# Altium PCB PCB.PcbDoc
Units mm, origin at the board's own origin, x right, y up, seen from the top; angles counter-clockwise.
Board outline 20 x 15 mm, 2 copper layers (Top Layer, Bottom Layer); 15 components, 12 nets, 62 pads, 10 vias.
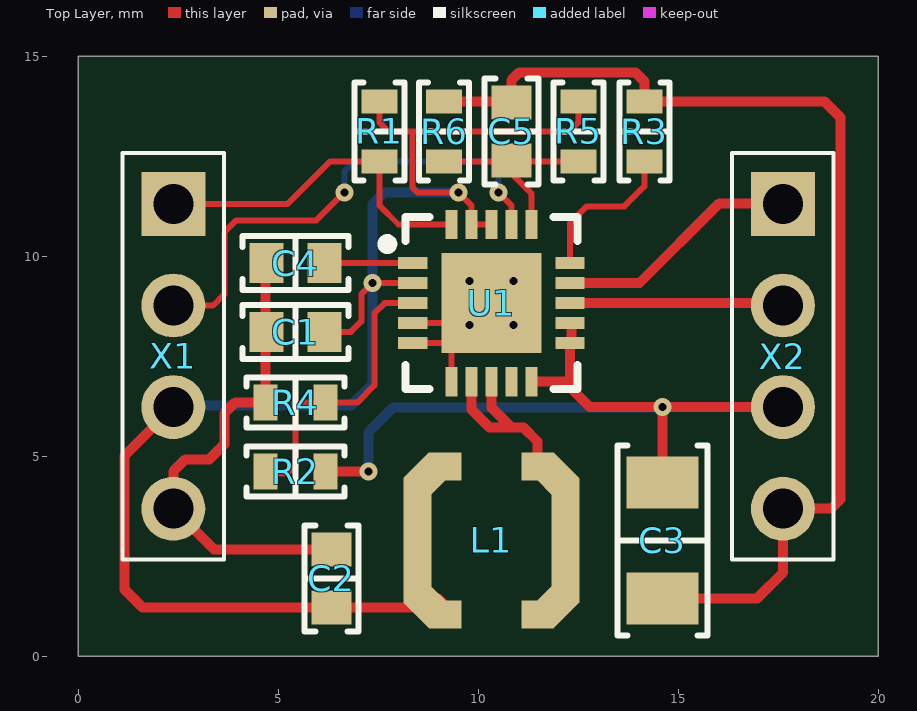
[diagram p0: Top Layer view]
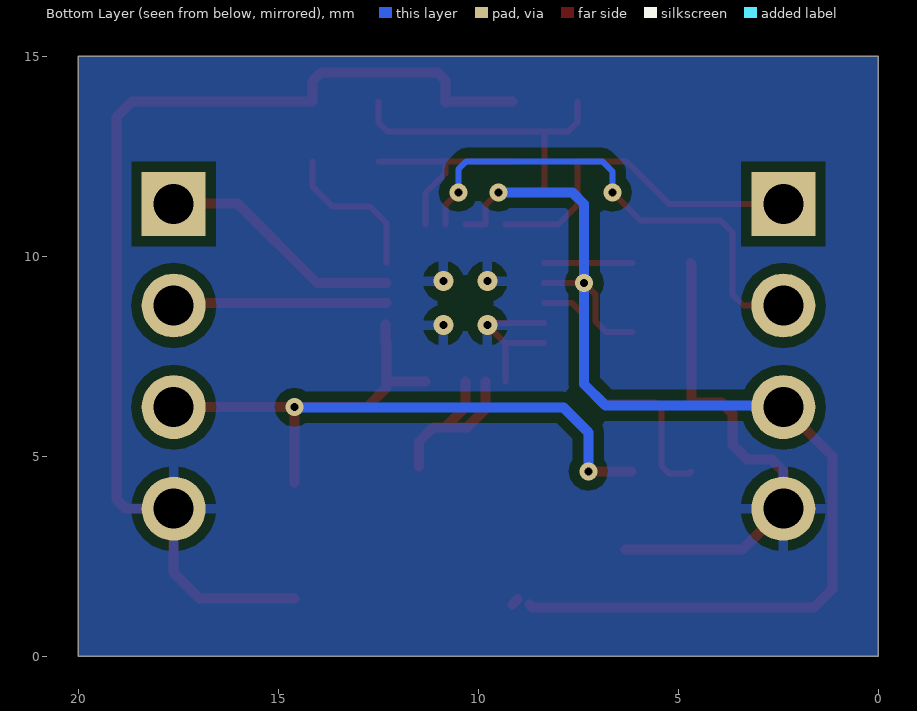
[diagram p1: Bottom Layer view, seen from below]
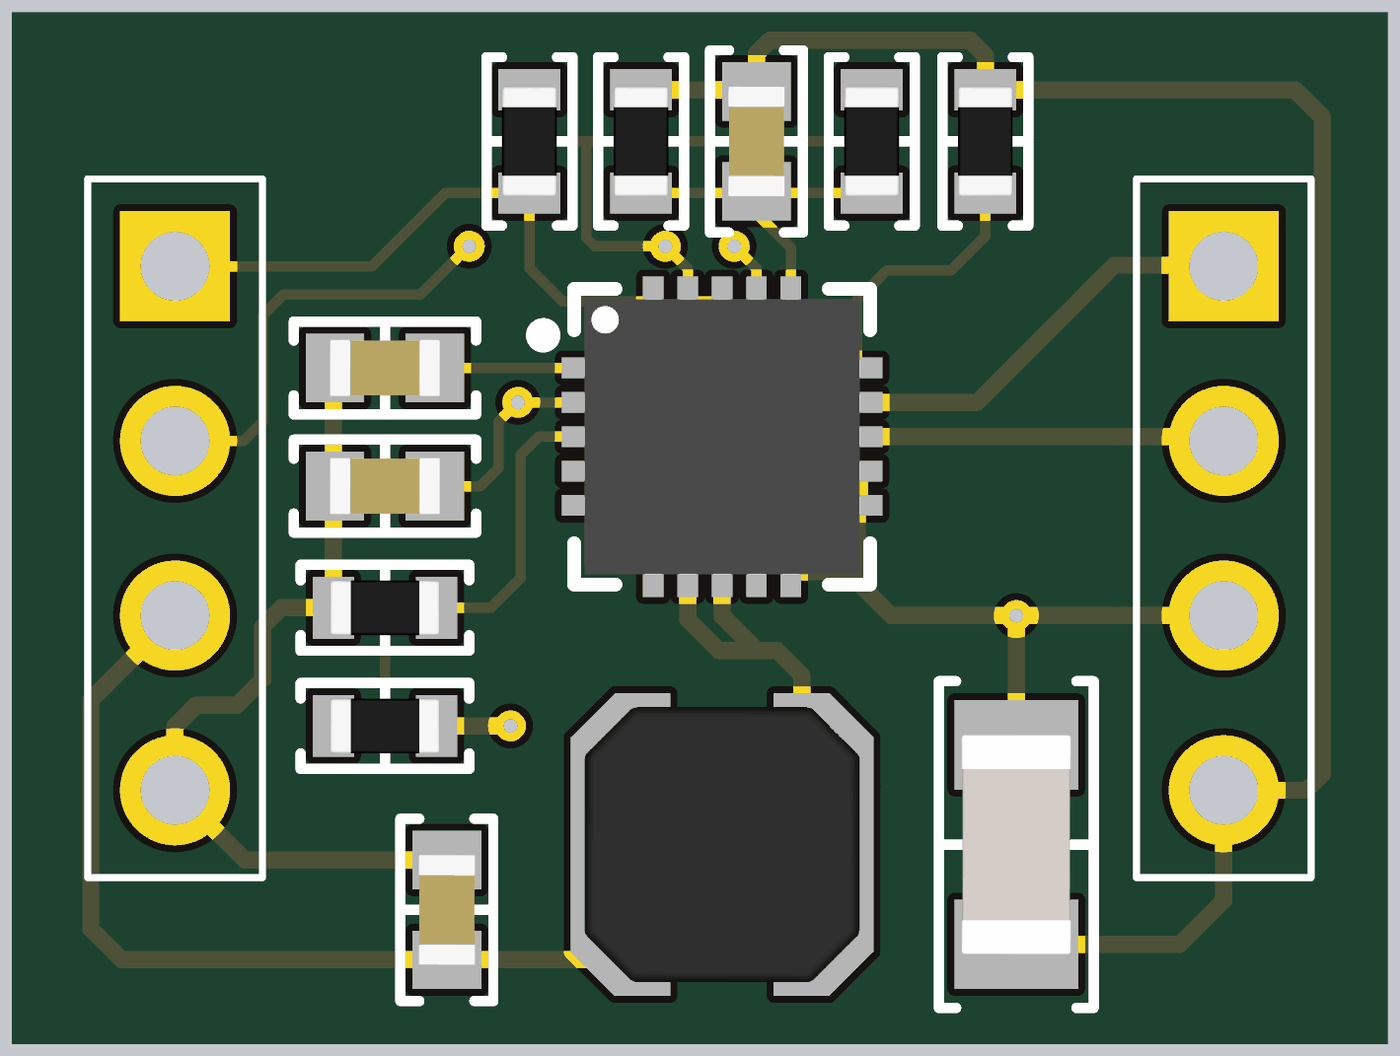
[diagram p2: 3D render of the assembled board from above, using the file's embedded part models]

## Layer stack, top to bottom
Top Solder: solder mask 0.0102, Solder Resist, Dk 3.5
Top Layer: signal copper 0.0356
Dielectric 1: dielectric 0.32, FR-4, Dk 4.8
Bottom Layer: signal copper 0.0356
Bottom Solder: solder mask 0.0102, Solder Resist, Dk 3.5

## Board outline
0,0 20,0 20,15 0,15

## Design rules (kind name [scope] priority, off if disabled: settings)
Clearance [All] p1: gap=0.254 ignorepadtopadclearanceinfootprint=FALSE except(0: Arc-Hole Track-Hole SMDPad-Hole THPad-Hole Via-Hole Fill-Hole Poly-Hole Region-Hole Text-Hole)
PolygonConnect [All] p1: connectstyle=Relief reliefconductorwidth=0.254 reliefentries=4 polygonreliefangle="90 Angle" airgapwidth=0.254
RoutingVias [All] p1: holewidth=0.711 width=1.27 viastyle="Through Hole" minholewidth=0.2 minwidth=0.45 maxholewidth=0.711 maxwidth=1.27
SolderMaskExpansion [All] p1: expansion=0.102
Width [All] p1: maxlimit=0.254 minlimit=0.15 preferedwidth=0.254
30 further rules are at their usual default settings.

## Components (designator, comment, footprint, x,y, rotation, side; value= is the part's Value field where it differs from the comment)
C1 "100nF" "CAP 0603/1608" 5.425,8.112 r0 top
C2 "100nF" "CAP 0603/1608" 6.325,1.95 r270 top
C3 "100nF" "CAP 1206/3216" 14.6,2.9 r90 top
C4 "100nF" "CAP 0603/1608" 5.425,9.831 r180 top
C5 "100nF" "CAP 0603/1608" 10.825,13.125 r90 top
L1 "4.7uH" COILCRAFT_LPS4018 10.325,2.9 r0 top
R1 "100K" "RES 0603/1608" 7.525,13.125 r90 top
R2 "768K" "RES 0603/1608" 5.425,4.625 r0 top
R3 "7K5" "RES 0603/1608" 14.15,13.125 r270 top
R4 "9K76" "RES 0603/1608" 5.425,6.344 r0 top
R5 "2K2" "RES 0603/1608" 12.5,13.125 r270 top
R6 "2K2" "RES 0603/1608" 9.147,13.125 r270 top
U1 "DRV8662RGPT" "QFN-20 4x4MM" 10.325,8.831 r0 top
X1 "TH_Pad" "1X4 TH_PAD" 2.375,11.31 r270 top
X2 "TH_Pad" "1X4 TH_PAD" 17.615,11.31 r270 top

## Footprints (in the part's own frame and the unit in brackets; to place one, negate y for a bottom-side part, rotate by r counter-clockwise, add the part's x,y. Pads: shape width x height; smd on the part's side, far side on the other; paste and mask are expansions set on the pad)
"1X4 TH_PAD" [mm] "1X4 2.54MM TH PAD"
  rect 1.6x1.6 hole 1: 1(0,0)
  round 1.6 hole 1: 2(2.54,0) 3(5.08,0) 4(7.62,0)
  silkscreen extent -1.27,-1.27 8.89,1.27
"CAP 0603/1608" [mm] "Chip Capacitor, 2-Leads, Body 1.60x0.80mm, IPC Medium Density"
  rect 0.85x1 smd: 1(-0.725,0) 2(0.725,0)
  silkscreen extent -1.33,-0.67 1.33,0.67, body extent -0.8,-0.41 0.8,0.41, height 0.82
"CAP 1206/3216" [mm] "Chip Capacitor, 2-Leads, Body 3.25x1.60mm, IPC Medium Density"
  rect 1.3x1.8 smd: 1(-1.45,0) 2(1.45,0)
  silkscreen extent -2.37,-1.12 2.37,1.12, body extent -1.6,-0.8 1.6,0.8, height 0.8
COILCRAFT_LPS4018 [mm] "Shielded Power Inductor, Body 4.0x4.0x1.8mm"
  round 0.5 on Mech15: 0(0,0)
  rrect1% 0.7x3.124 smd: 1(-1.85,0) 2(1.85,0)
  rrect1% 0.786x0.902 smd rot 45: 1(-1.603,-1.603) 2(1.603,1.603)
  rrect1% 0.786x0.902 smd rot 135: 1(-1.603,1.603) 2(1.603,-1.603)
  rrect1% 0.812x0.7 smd: 1(-1.156,-1.85) 1(-1.156,1.85) 2(1.156,-1.85) 2(1.156,1.85)
  Top Layer pour cut-out: -1.524,2.286 1.524,2.286 1.524,-2.286 -1.524,-2.286
  body extent -2,-2 2,2, height 1.79
"QFN-20 4x4MM" [mm] "QFN, 20-Leads, Body 4.00x4.00mm, Pitch 0.50mm, Thermal Pad 2.50x2.50mm, IPC Medium Density"
  rect 0.73x0.3 smd: 1(-1.965,1) 2(-1.965,0.5) 3(-1.965,0) 4(-1.965,-0.5) 5(-1.965,-1) 11(1.965,-1) 12(1.965,-0.5) 13(1.965,0) 14(1.965,0.5) 15(1.965,1)
  rect 0.3x0.73 smd: 6(-1,-1.965) 7(-0.5,-1.965) 8(0,-1.965) 9(0.5,-1.965) 10(1,-1.965) 16(1,1.965) 17(0.5,1.965) 18(0,1.965) 19(-0.5,1.965) 20(-1,1.965)
  rect 2.5x2.5 smd: 21(0,0)
  silkscreen extent -2.72,-2.15 2.15,2.15, body extent -2,-2 2.01,2.01, height 0.9
"RES 0603/1608" [mm] "Chip Resistor, 2-Leads, Body 1,60x0,80mm, IPC Medium Density"
  rect 0.6x0.9 smd: 1(-0.75,0) 2(0.75,0)
  silkscreen extent -1.22,-0.63 1.22,0.63, body extent -0.8,-0.4 0.8,0.4, height 0.5

## Part data
C1 C2 C4 C5: library part CGA3E2X7R1E104K080AA, "CAPACITOR 0603 100nF 25V 10%", Case/Package=0603, Case Code (Metric)=1608, Dielectric=X7R, Manufacturer=TDK, Max Operating Temperature=125°C, Min Operating Temperature=-55°C, Package Quantity=1, Ratings=AEC-Q200, Resistor Type=Ceramic, Tolerance=10%, Voltage Rating=25V, Capacitance=100nF, Case Code (Imperial)=0603, ComponentLink1Description=http://www.farnell.com/datasheets/1735392.pdf?src-supplier=Element14, ComponentLink1URL=http://www.farnell.com/datasheets/1735392.pdf?src-supplier=Element14, ComponentLink2Description=https://product.tdk.com/info/en/documents/chara_sheet/CGA3E2X7R1E104K080AA.pdf?src-supplier=Mouser, ComponentLink2URL=https://product.tdk.com/info/en/documents/chara_sheet/CGA3E2X7R1E104K080AA.pdf?src-supplier=Mouser, ComponentLink3Description=http://product.tdk.com/capacitor/mlcc/en/documents/mlccspec_automotive_general_midvoltage_en.pdf?src-supplier=Future+Electronics, ComponentLink3URL=http://product.tdk.com/capacitor/mlcc/en/documents/mlccspec_automotive_general_midvoltage_en.pdf?src-supplier=Future+Electronics, ComponentLink4Description=http://www.farnell.com/datasheets/1735392.pdf?src-supplier=Newark, ComponentLink4URL=http://www.farnell.com/datasheets/1735392.pdf?src-supplier=Newark, Depth=0.8mm, Height=0.8mm, Lead Free="Lead Free", Length=1.6mm, Manufacturer Part Number=CGA3E2X7R1E104K080AA, Mount="Surface Mount", Packaging="Tape and Reel", REACH SVHC="No SVHC", Stock 1=0, Supplier 1=Farnell, Termination=SMD/SMT, Thickness=0.035inch, Voltage Rating (DC)=25V, Weight=7.1E-05oz, Width=0.031inch
C3: library part GRM31CR72E104KW03L, "CAPACITOR 1206 100nF 250V X7R 10%", Case/Package=1206, Case Code (Metric)=3216, Dielectric=X7R, Insulation Resistance=10GR, Manufacturer=Murata, Max Operating Temperature=125°C, Min Operating Temperature=-55°C, Package Quantity=1, Tolerance=10%, Voltage=250V, Capacitance=100nF, Case Code (Imperial)=1206, ComponentLink1Description=http://search.murata.co.jp/Ceramy/image/img/A01X/G101/ENG/GRM31CR72E104KW03-01.pdf?src-supplier=Digi-Key, ComponentLink1URL=http://search.murata.co.jp/Ceramy/image/img/A01X/G101/ENG/GRM31CR72E104KW03-01.pdf?src-supplier=Digi-Key, ComponentLink2Description=http://www.farnell.com/datasheets/2048642.pdf?src-supplier=Element14, ComponentLink2URL=http://www.farnell.com/datasheets/2048642.pdf?src-supplier=Element14, ComponentLink3Description=http://www.jameco.com/Jameco/Products/ProdDS/1859520.pdf?src-supplier=Jameco, ComponentLink3URL=http://www.jameco.com/Jameco/Products/ProdDS/1859520.pdf?src-supplier=Jameco, ComponentLink4Description=http://psearch.en.murata.com/capacitor/product/GRM31CR72E104KW03%23.pdf?src-supplier=Future+Electronics, ComponentLink4URL=http://psearch.en.murata.com/capacitor/product/GRM31CR72E104KW03%23.pdf?src-supplier=Future+Electronics, ComponentLink5Description=http://uk.rs-online.com/webdocs/1423/0900766b81423c94.pdf?src-supplier=RSComponents, ComponentLink5URL=http://uk.rs-online.com/webdocs/1423/0900766b81423c94.pdf?src-supplier=RSComponents, ComponentLink6Description=http://components.arrow.com/part/dataview/41887619S9850855N2606?src-supplier=Arrow+Electronics, ComponentLink6URL=http://components.arrow.com/part/dataview/41887619S9850855N2606?src-supplier=Arrow+Electronics, Depth=1.6mm, Dissipation Factor=0.025%, Height=1.6mm, Lead Free="Lead Free", Length=3.2mm, Manufacturer Part Number=GRM31CR72E104KW03L, Material=Ceramic, Mount="Surface Mount", Number of Pins=2, Packaging="Tape and Reel", Pricing 1="150=0.332, 250=0.321, 500=0.257, 1000=0.193, 2000=0.154, 10000=0.129 (EUR)", Radiation Hardening=No, REACH SVHC="No SVHC", Stock 1=0, Supplier 1=Farnell, Termination=SMD/SMT, Thickness=0.071inch, Voltage Rating=250V, Voltage Rating (DC)=250V, Weight=0.000571oz, Width=1.6mm
L1: library part LPS4018-472MRB, "INDUCTOR 4.7µH 1.3A", DC Resistance (DCR)=125mR, Inductance Tolerance=20%, Manufacturer=Coilcraft, Max DC Current=1.9A, Max Operating Temperature=85°C, Min Operating Temperature=-40°C, Package Quantity=1, RMS Current (Irms)=1.3A, Self Resonant Frequency=65MHz, Test Frequency=100kHz, ComponentLink1Description=http://www.farnell.com/datasheets/1805324.pdf?src-supplier=Element14, ComponentLink1URL=http://www.farnell.com/datasheets/1805324.pdf?src-supplier=Element14, Core Material=Ferrite, Height=1.7mm, Inductance=4.7uH, Length=4mm, Manufacturer Part Number=LPS4018-472MRB, Packaging="Cut Tape", Pricing 1="10=1.57, 50=0.828, 100=0.742, 250=0.656, 500=0.57, 1000=0.472, 5000=0.463 (EUR)", REACH SVHC="No SVHC", Saturation Current=1.9A, Shielding=Shielded, Stock 1=0, Supplier 1=Farnell, Termination=SMD/SMT, Tolerance=20%, Weight=0.003527oz, Width=4mm
R1: library part ERJ3EKF1003V, "RESISTOR 0603 100K 1%", Case/Package=0603, Case Code (Metric)=1608, Manufacturer=Panasonic, Max Operating Temperature=155°C, Max Power Dissipation=100mW, Min Operating Temperature=-55°C, Package Quantity=5000, Resistor Type="Thick Film", Temperature Coefficient=100ppm/°C, Tolerance=1%, Voltage Rating=75V, Case Code (Imperial)=0603, ComponentLink1Description=http://industrial.panasonic.com/www-data/pdf/AOA0000/AOA0000CE2.pdf?src-supplier=Future+Electronics, ComponentLink1URL=http://industrial.panasonic.com/www-data/pdf/AOA0000/AOA0000CE2.pdf?src-supplier=Future+Electronics, ComponentLink2Description=https://www.verical.com/server-webapp/html/getDatasheet?partID=247527&src-supplier=Verical, ComponentLink2URL=https://www.verical.com/server-webapp/html/getDatasheet?partID=247527&src-supplier=Verical, ComponentLink3Description=http://www.alliedelec.com/m/d/623f45ff1957d936ff56d46fd1c28cac.pdf?src-supplier=Allied+Electronics, ComponentLink3URL=http://www.alliedelec.com/m/d/623f45ff1957d936ff56d46fd1c28cac.pdf?src-supplier=Allied+Electronics, ComponentLink4Description=http://www.jameco.com/Jameco/Products/ProdDS/1987476.pdf?src-supplier=Jameco, ComponentLink4URL=http://www.jameco.com/Jameco/Products/ProdDS/1987476.pdf?src-supplier=Jameco, Contact Plating=Tin, Depth=0.8mm, Features="Automotive AEC-Q200", Height=0.022inch, Lead Free="Lead Free", Length=1.6mm, Manufacturer Part Number=ERJ3EKF1003V, Military Standard=Not, Mount="Surface Mount", Number of Pins=2, Number of Terminations=2, Packaging="Tape and Reel", Power Rating=100mW, Radiation Hardening=No, REACH SVHC="No SVHC", Resistance=100K, Stock 1=0, Supplier 1=Farnell, Termination=SMD/SMT, Voltage Rating (DC)=75V, Weight=7.1E-05oz, Width=0.8mm
R2: library part ERJ3EKF7683V, "RESISTOR 0603 768K 1%", Case/Package=0603, Case Code (Metric)=1608, Manufacturer=Panasonic, Manufacturer Part Number=ERJ-3EKF7683V, Max Operating Temperature=155°C, Max Power Dissipation=100mW, Min Operating Temperature=-55°C, Package Quantity=1, Resistor Type="Thick Film", Temperature Coefficient=100ppm/°C, Tolerance=1%, Voltage Rating=75V, Voltage Rating (DC)=50V, Case Code (Imperial)=0603, ComponentLink1Description=http://www.farnell.com/datasheets/1678782.pdf?src-supplier=Element14, ComponentLink1URL=http://www.farnell.com/datasheets/1678782.pdf?src-supplier=Element14, ComponentLink2Description=http://industrial.panasonic.com/www-data/pdf/AOA0000/AOA0000CE2.pdf?src-supplier=Avnet, ComponentLink2URL=http://industrial.panasonic.com/www-data/pdf/AOA0000/AOA0000CE2.pdf?src-supplier=Avnet, Contact Plating=Tin, Depth=0.8mm, Features="Automotive AEC-Q200", Height=0.022inch, Lead Free="Lead Free", Length=1.6mm, Military Standard=Not, Mount="Surface Mount", Number of Terminations=2, Packaging="Tape and Reel", Power Rating=100mW, REACH SVHC=Yes, Resistance=768K, Stock 1=0, Supplier 1=Farnell, Termination=SMD/SMT, Width=0.8mm
R3: library part ERJ3EKF7501V, "RESISTOR 0603 7.5K 1%", Case/Package=0603, Case Code (Metric)=1608, Manufacturer=Panasonic, Manufacturer Part Number=ERJ-3EKF7501V, Max Operating Temperature=155°C, Max Power Dissipation=100mW, Min Operating Temperature=-55°C, Package Quantity=1, Resistor Type="Thick Film", Temperature Coefficient=100ppm/°C, Tolerance=1%, Voltage Rating=75V, Voltage Rating (DC)=50V, Case Code (Imperial)=0603, ComponentLink1Description=http://www.farnell.com/datasheets/1911175.pdf?src-supplier=Farnell, ComponentLink1URL=http://www.farnell.com/datasheets/1911175.pdf?src-supplier=Farnell, ComponentLink2Description=http://www.farnell.com/datasheets/1678782.pdf?src-supplier=Element14, ComponentLink2URL=http://www.farnell.com/datasheets/1678782.pdf?src-supplier=Element14, ComponentLink3Description=http://industrial.panasonic.com/www-data/pdf/AOA0000/AOA0000CE2.pdf?src-supplier=Avnet, ComponentLink3URL=http://industrial.panasonic.com/www-data/pdf/AOA0000/AOA0000CE2.pdf?src-supplier=Avnet, ComponentLink4Description=http://www.farnell.com/datasheets/1911175.pdf?src-supplier=Element14, ComponentLink4URL=http://www.farnell.com/datasheets/1911175.pdf?src-supplier=Element14, ComponentLink5Description=http://www.farnell.com/datasheets/426256.pdf?src-supplier=Element14, ComponentLink5URL=http://www.farnell.com/datasheets/426256.pdf?src-supplier=Element14, ComponentLink6Description=https://www.alliedelec.com/m/d/623f45ff1957d936ff56d46fd1c28cac.pdf?src-supplier=Allied+Electronics, ComponentLink6URL=https://www.alliedelec.com/m/d/623f45ff1957d936ff56d46fd1c28cac.pdf?src-supplier=Allied+Electronics, Contact Plating=Tin, Depth=0.8mm, Features="Automotive AEC-Q200", Height=0.022inch, Lead Free="Lead Free", Length=1.6mm, Military Standard=Not, Mount="Surface Mount", Number of Terminations=2, Packaging="Tape and Reel", Power Rating=100mW, Pricing 1="150=0.0229, 500=0.0168, 1000=0.0106, 2500=0.0082, 5000=0.0065, 25000=0.006 (EUR)", Radiation Hardening=No, REACH SVHC="No SVHC", Resistance=7K5, Stock 1=0, Supplier 1=Farnell, Termination=SMD/SMT, Width=0.8mm
R4: library part ERJ3EKF9761V, "RESISTOR 0603 9.76K 1%", Case/Package=0603, Case Code (Metric)=1608, Manufacturer=Panasonic, Manufacturer Part Number=ERJ-3EKF9761V, Max Operating Temperature=155°C, Max Power Dissipation=100mW, Min Operating Temperature=-55°C, Package Quantity=1, Resistor Type="Thick Film", Temperature Coefficient=100ppm/°C, Tolerance=1%, Voltage Rating=75V, Voltage Rating (DC)=50V, Case Code (Imperial)=0603, ComponentLink1Description=http://industrial.panasonic.com/www-data/pdf/AOA0000/AOA0000CE2.pdf?src-supplier=Avnet+Europe, ComponentLink1URL=http://industrial.panasonic.com/www-data/pdf/AOA0000/AOA0000CE2.pdf?src-supplier=Avnet+Europe, ComponentLink2Description=http://www.farnell.com/datasheets/1694929.pdf?src-supplier=Element14, ComponentLink2URL=http://www.farnell.com/datasheets/1694929.pdf?src-supplier=Element14, ComponentLink3Description=http://industrial.panasonic.com/www-data/pdf/AOA0000/AOA0000CE2.pdf?src-supplier=Avnet, ComponentLink3URL=http://industrial.panasonic.com/www-data/pdf/AOA0000/AOA0000CE2.pdf?src-supplier=Avnet, ComponentLink4Description=http://www.farnell.com/datasheets/1678782.pdf?src-supplier=Element14, ComponentLink4URL=http://www.farnell.com/datasheets/1678782.pdf?src-supplier=Element14, ComponentLink5Description=https://www.alliedelec.com/m/d/623f45ff1957d936ff56d46fd1c28cac.pdf?src-supplier=Allied+Electronics, ComponentLink5URL=https://www.alliedelec.com/m/d/623f45ff1957d936ff56d46fd1c28cac.pdf?src-supplier=Allied+Electronics, ComponentLink6Description=http://www.mouser.com/ds/2/315/AOA0000CE2-37512.pdf?src-supplier=Mouser, ComponentLink6URL=http://www.mouser.com/ds/2/315/AOA0000CE2-37512.pdf?src-supplier=Mouser, Contact Plating=Tin, Depth=0.8mm, Features="Automotive AEC-Q200", Height=0.022inch, Lead Free="Lead Free", Length=1.6mm, Military Standard=Not, Mount="Surface Mount", Number of Terminations=2, Packaging="Tape and Reel", Power Rating=100mW, Radiation Hardening=No, REACH SVHC="No SVHC", Resistance=9K76, Stock 1=0, Supplier 1=Farnell, Termination=SMD/SMT, Width=0.031inch
R5 R6: library part ERJ3EKF2201V, "RESISTOR 0603 2.2K 1%", Case/Package=0603, Case Code (Metric)=1608, Manufacturer=Panasonic, Manufacturer Part Number=ERJ-3EKF2201V, Max Operating Temperature=155°C, Max Power Dissipation=100mW, Min Operating Temperature=-55°C, Package Quantity=5000, Resistor Type="Thick Film", Temperature Coefficient=100ppm/°C, Tolerance=1%, Voltage Rating=75V, Case Code (Imperial)=0603, ComponentLink1Description=http://industrial.panasonic.com/www-data/pdf/AOA0000/AOA0000CE2.pdf?src-supplier=Avnet, ComponentLink1URL=http://industrial.panasonic.com/www-data/pdf/AOA0000/AOA0000CE2.pdf?src-supplier=Avnet, ComponentLink2Description=http://www.farnell.com/datasheets/1678782.pdf?src-supplier=Element14, ComponentLink2URL=http://www.farnell.com/datasheets/1678782.pdf?src-supplier=Element14, ComponentLink3Description=http://www.mouser.com/ds/2/315/AOA0000C283-1093288.pdf?src-supplier=Mouser, ComponentLink3URL=http://www.mouser.com/ds/2/315/AOA0000C283-1093288.pdf?src-supplier=Mouser, ComponentLink4Description=https://www.alliedelec.com/m/d/623f45ff1957d936ff56d46fd1c28cac.pdf?src-supplier=Allied+Electronics, ComponentLink4URL=https://www.alliedelec.com/m/d/623f45ff1957d936ff56d46fd1c28cac.pdf?src-supplier=Allied+Electronics, ComponentLink5Description=http://industrial.panasonic.com/www-data/pdf/AOA0000/AOA0000CE2.pdf?src-supplier=Element14, ComponentLink5URL=http://industrial.panasonic.com/www-data/pdf/AOA0000/AOA0000CE2.pdf?src-supplier=Element14, ComponentLink6Description=http://industrial.panasonic.com/www-data/pdf/AOA0000/AOA0000CE2.pdf?src-supplier=Avnet+Europe, ComponentLink6URL=http://industrial.panasonic.com/www-data/pdf/AOA0000/AOA0000CE2.pdf?src-supplier=Avnet+Europe, ComponentLink7Description=http://www.farnell.com/datasheets/1911175.pdf?src-supplier=Element14, ComponentLink7URL=http://www.farnell.com/datasheets/1911175.pdf?src-supplier=Element14, Contact Plating=Tin, Depth=0.8mm, Height=0.022inch, Lead Free="Lead Free", Length=1.6mm, Military Standard=Not, Mount="Surface Mount", Number of Pins=2, Number of Terminations=2, Packaging="Tape and Reel", Power Rating=100mW, Radiation Hardening=No, REACH SVHC="No SVHC", Resistance=2K2, Stock 1=0, Supplier 1=Farnell, Termination=SMD/SMT, Voltage Rating (DC)=75V, Width=0.8mm
U1: "PIEZO HAPTIC DRIVER", Case/Package=QFN, Collector Emitter Voltage (VCEO)=5V, Manufacturer="Texas Instruments", Max Input Voltage=750mV, Max Operating Temperature=70°C, Max Supply Voltage=5.5V, Min Input Voltage=1.4V, Min Operating Temperature=-40°C, Min Supply Voltage=3V, Nominal Supply Current=5mA, Output Current=75mA, Output Voltage=100V, Package Quantity=250, ComponentLink1Description=http://www.ti.com/general/docs/lit/getliterature.tsp?genericPartNumber=DRV8662&amp;&amp;fileType=pdf&src-supplier=Newark, ComponentLink1URL=http://www.ti.com/general/docs/lit/getliterature.tsp?genericPartNumber=DRV8662&amp;&amp;fileType=pdf&src-supplier=Newark, ComponentLink2Description=http://www.ti.com/lit/ds/symlink/drv8662.pdf?src-supplier=Digi-Key, ComponentLink2URL=http://www.ti.com/lit/ds/symlink/drv8662.pdf?src-supplier=Digi-Key, ComponentLink3Description=https://www.verical.com/server-webapp/html/getDatasheet?partID=522234&src-supplier=Verical, ComponentLink3URL=https://www.verical.com/server-webapp/html/getDatasheet?partID=522234&src-supplier=Verical, ComponentLink4Description=http://www.ti.com/lit/ds/symlink/drv8662.pdf?src-supplier=Avnet+Europe, ComponentLink4URL=http://www.ti.com/lit/ds/symlink/drv8662.pdf?src-supplier=Avnet+Europe, ComponentLink5Description=http://www.ti.com/general/docs/lit/getliterature.tsp?genericPartNumber=DRV8662&&fileType=pdf&src-supplier=Avnet, ComponentLink5URL=http://www.ti.com/general/docs/lit/getliterature.tsp?genericPartNumber=DRV8662&&fileType=pdf&src-supplier=Avnet, Contact Plating=Gold, Height=0.95mm, Interface=PWM,Analog, Lead Free="Lead Free", Length=4.15mm, Logic Function="AND GATE", Manufacturer Part Number=DRV8662RGPT, Number of Pins=20, Packaging="Tape and Reel", Quiescent Current=5mA, Radiation Hardening=No, REACH SVHC="No SVHC", Stock 1=0, Supplier 1=Farnell, Width=4.15mm
X1 X2: "1X4 2.54MM TH Pad"

## Via types
v1: diameter 0.45, hole 0.2, Top Layer to Bottom Layer, 6 vias
v2: diameter 0.5, hole 0.2, Top Layer to Bottom Layer, 4 vias

## Nets (pads, with @x,y where several pads share a name; then routed paths per layer and width w, separated by ;. In a path a pad name is that pad's centre, name@x,y a point inside that pad or via, vN(x,y) a via of type N, cw(c..) or ccw(c..) an arc to the next point about the centre after c; other vN are vias at no path point)
ENABLE: R1.1 U1.20 X1.1 | length 8.7
  Top Layer w0.15: X1.1 5.235,11.31 6.3,12.375 R1.1 7.525,11.275 8.004,10.796 U1.20
GND: C1.1 C2.1 C3.1 C4.2 C5.2 R3.1 R4.1 R6.1 U1.4 U1.5 U1.6 U1.21 X1.4 X2.4 | length 43.6
  Top Layer w0.15: U1.5 U1.21@9.325,7.831 ; U1.4 9.825,8.331 v2(9.775,8.281) U1.21@9.325,7.831 ; U1.6 U1.21@9.325,7.831
  Top Layer w0.25: C4.2 4.675,9.806 R4.1 3.931,6.344 3.925,6.35 3.65,6.075 3.65,5.3 3.275,4.925 2.675,4.925 2.375,4.625 X1.4 3.39,2.675 C2.1 ; R6.1 10.8,13.875 C5.2 10.825,14.4 11.025,14.6 13.925,14.6 14.15,14.375 R3.1 18.65,13.875 19.05,13.475 19.05,3.925 18.815,3.69 X2.4 17.615,2.09 16.975,1.45 C3.1
  other v2: 10.875,8.281 9.775,9.381 10.875,9.381
NetC4_1: C4.1 U1.1 | length 2.2
  Top Layer w0.15: C4.1 U1.1
NetC5_1: C5.1 R5.2 R6.2 U1.16 | length 5.2
  Top Layer w0.15: R6.2 C5.1@10.825,12.375 ; C5.1 C5.1@10.825,12.375 ; U1.16 11.325,11.575 10.825,12.075 C5.1@10.825,12.375 ; R5.2 C5.1@10.825,12.375
NetL1_2: L1.2 U1.7 U1.8 | length 4.6
  Top Layer w0.25: U1.7 9.825,6.175 10.275,5.725 10.825,5.725 ; U1.8 10.325,6.225 10.825,5.725 ; L1.2@11.481,4.75 11.481,5.369 11.125,5.725 10.825,5.725
NetR2_1: R2.1 R4.2 U1.3 | length 7.4
  Top Layer w0.15: R2.1 4.725,4.575 5.235,4.575 5.425,4.765 5.425,6.2 5.569,6.344 R4.2 6.969,6.344 7.4,6.775 7.4,8.575 7.656,8.831 U1.3
NetR3_2: R3.2 U1.15 | length 3.9
  Top Layer w0.15: U1.15 12.29,10.825 12.715,11.25 13.65,11.25 14.15,11.75 R3.2
OUT_N: U1.14 X2.1 | length 6.2
  Top Layer w0.25: U1.14 14.031,9.331 16.025,11.325 17.6,11.325 X2.1
OUT_P: U1.13 X2.2 | length 5.4
  Top Layer w0.25: U1.13 17.554,8.831 X2.2
VBOOST: C3.2 R2.2 U1.10 U1.11 U1.12 X2.3 | length 19.6
  Top Layer w0.25: R2.2 v1(7.25,4.625) ; U1.10 12.29,6.866 ; U1.11 12.29,6.866 ; U1.11@12.325,7.831 U1.12@12.325,8.296 ; C3.2 v1(14.6,6.23) ; X2.3 v1(14.6,6.23) ; 12.29,6.866 12.29,6.725 12.785,6.23 v1(14.6,6.23)
  Bottom Layer w0.25: v1(7.25,4.625) 7.25,5.6 7.875,6.225 14.595,6.225 v1(14.6,6.23)
VIN: U1.17 X1.2 | length 12.4
  Top Layer w0.15: X1.2 3.37,8.77 3.65,9.05 3.65,10.6 3.95,10.9 5.95,10.9 v1(6.65,11.6) ; v1(10.5,11.6) 10.825,11.275 U1.17
  Bottom Layer w0.15: v1(6.65,11.6) 6.65,12.125 6.9,12.375 10.3,12.375 10.5,12.175 v1(10.5,11.6)
VSUPPLY: C1.2 C2.2 L1.1 R1.2 R5.1 U1.2 U1.18 U1.19 X1.3 | length 38.4
  Top Layer w0.15: C1.2 6.812,8.112 7.075,8.375 7.075,9.05 v1(7.356,9.331) U1.2 ; R1.2 7.525,13.35 7.75,13.125 8.35,13.125 ; U1.18 U1.19 9.825,11.275 v1(9.5,11.6) 8.475,11.6 8.35,11.725 8.35,13.125 ; R5.1 12.5,13.35 12.275,13.125 8.35,13.125
  Top Layer w0.25: X1.3 1.15,5.005 1.15,1.675 1.6,1.225 C2.2 8.65,1.225 L1.1@8.722,1.297
  Top Layer w0.254: L1.1@9.019,1.425 L1.1@9.147,1.297
  Bottom Layer w0.25: X1.3 2.42,6.275 6.825,6.275 7.356,6.806 v1(7.356,9.331) 7.356,11.306 7.65,11.6 v1(9.5,11.6)
pads on no net: L1.0 U1.9

## Polygon pours and split planes (outlines as drawn)
GND on Bottom Layer "Bottom-GND" (solid, pour order 0): 0,0 20,0 20,15 0,15

## Other copper
Top Layer:
  region net GND: 14.15,13.875

## Silkscreen, mask and mechanical layers (free items; w line width, h text height)
Mechanical 1:
  the board outline again, w0.1